# EAGLE board Final Practicum Board Layout (EAGLE 9.5.1)
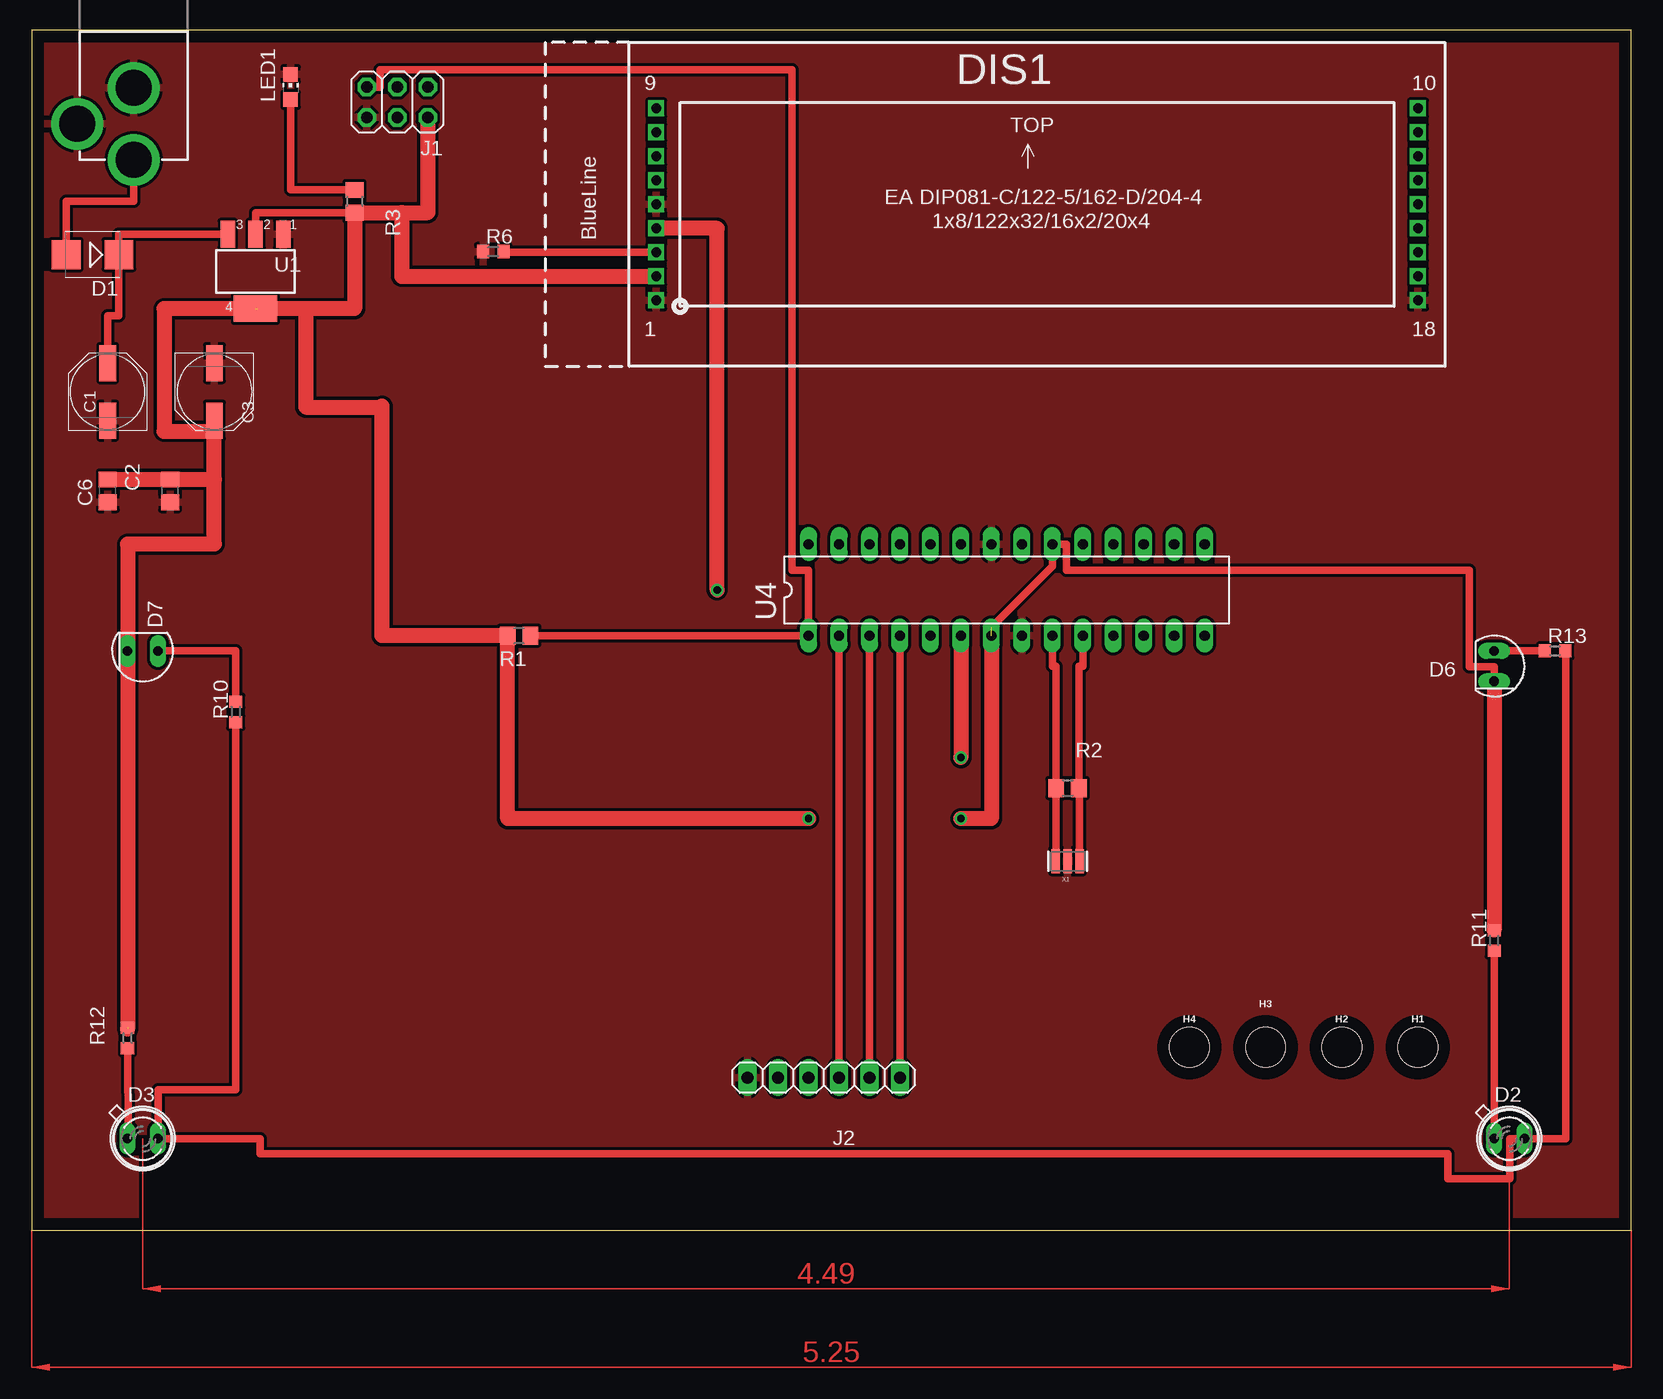
[diagram p0: board, top side]
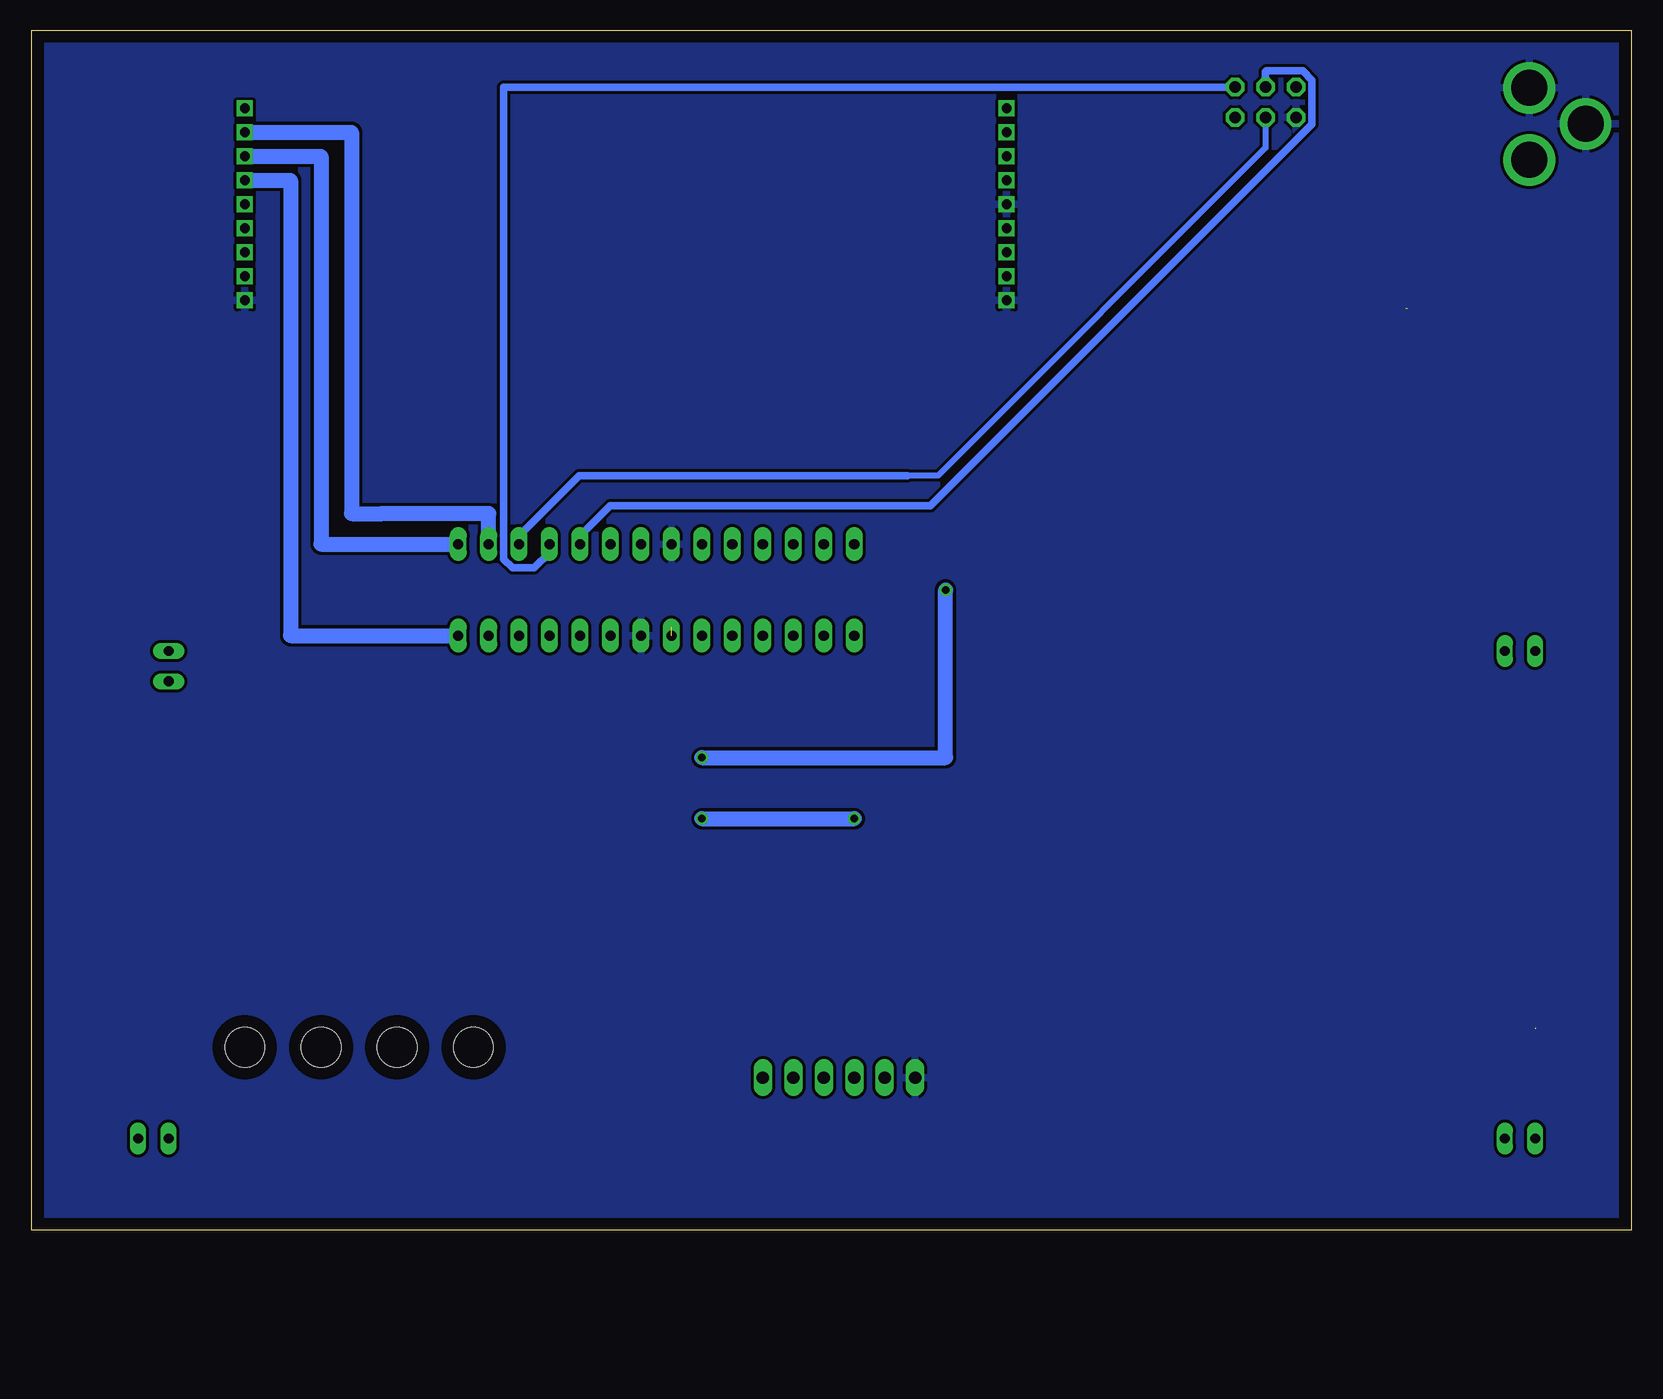
[diagram p1: board, bottom side, seen from below]

Size 133.33 x 100 mm. Coordinates in mm from the lower left corner, seen from the top.
Outline: 0,0 133.33,0 133.33,100 0,100 0,0
Copper layers (1*16): Top 0.035mm / dielectric 1.5mm / Bottom 0.035mm
Design rules "default": minimum track width 6mil, minimum drill 0.35mm, track to track 6mil, track to pad 6mil, pad to pad 6mil, via to via 6mil, smd to smd 6mil, copper to edge 40mil, drill to drill 6mil, minimum pad ring 10mil, minimum via ring 8mil, stop-mask expansion 4mil, vias tented up to drill 0mil, thermal gap 10mil
Net classes: 0 default: width 0.254 mm, clearance 0.254 mm; 1 power: width 0.61 mm, drill 0.61 mm, clearance 0.254 mm; 2 gnd: width 0.305 mm, drill 0.559 mm, clearance 0.254 mm; 3 usbvcc: width 0.508 mm, drill 0.61 mm, clearance 0.254 mm

## Footprints (pad centres in the part's own frame; a part is rotated, then mirrored left to right if it is on the bottom)
PANASONIC_D = smd 3 x 1.4: + 2.4,0; - -2.4,0
C0805 = smd 1.3 x 1.5: 1 -0.95,0; 2 0.95,0
SMB = smd 2.4 x 2.4: A 2.2,0; C -2.2,0
SFH482 = drill 0.813 long: A -1.27,0; K 1.27,0
SFH206 = drill 0.813 long: A 0,-1.27; K 0,1.27
EA_DIP = drill 0.813 pad 1.27 square: 1 0,0; 2 0,2; 3 0,4; 4 0,6; 5 0,8; 6 0,10; 7 0,12; 8 0,14; 9 0,16; 10 63.5,16; 11 63.5,14; 12 63.5,12; 13 63.5,10; 14 63.5,8; 15 63.5,6; 16 63.5,4; 17 63.5,2; 18 63.5,0
STAND-OFF = hole 3.302: 0,0
2X03 = drill 0.95 pad 1.55 octagon: 1 -2.54,-1.27; 2 -2.54,1.27; 3 0,-1.27; 4 0,1.27; 5 2.54,-1.27; 6 2.54,1.27
1X06 = drill 1.016 long: 1 -6.35,0; 2 -3.81,0; 3 -1.27,0; 4 1.27,0; 5 3.81,0; 6 6.35,0
POWER_JACK_PTH = drill 2.997 pad 4.318: GND 0,7.7; GNDBREAK 4.7,10.7; PWR 0,13.7
CHIP-LED0805 = smd 1.2 x 1.2: A 0,-1.05; C 0,1.05
R0805 = smd 1.3 x 1.5: 1 -0.95,0; 2 0.95,0
R0603 = smd 1 x 1.1: 1 -0.85,0; 2 0.85,0
SOT223 = smd 1.219 x 2.235: 1 -2.311,-3.099; 2 0,-3.099; 3 2.311,-3.099 | smd 3.6 x 2.2: 4 0,3.099
DIL28-3 = drill 0.85 pad 1.422 long: 1 -16.51,-3.81; 2 -13.97,-3.81; 3 -11.43,-3.81; 4 -8.89,-3.81; 5 -6.35,-3.81; 6 -3.81,-3.81; 7 -1.27,-3.81; 8 1.27,-3.81; 9 3.81,-3.81; 10 6.35,-3.81; 11 8.89,-3.81; 12 11.43,-3.81; 13 13.97,-3.81; 14 16.51,-3.81; 15 16.51,3.81; 16 13.97,3.81; 17 11.43,3.81; 18 8.89,3.81; 19 6.35,3.81; 20 3.81,3.81; 21 1.27,3.81; 22 -1.27,3.81; 23 -3.81,3.81; 24 -6.35,3.81; 25 -8.89,3.81; 26 -11.43,3.81; 27 -13.97,3.81; 28 -16.51,3.81
RESONATOR = smd 0.7 x 2: 1 -1,0; 2 0,0; 3 1,0

## Placement (x,y rotation side)
C1  47u  [PANASONIC_D]  6.35,69.85 90 top
C2  100n  [C0805]  11.56,61.59 90 top
C3  47u  [PANASONIC_D]  15.24,69.85 270 top
C6  100n  [C0805]  6.35,61.59 90 top
D1  M7  [SMB]  5.08,81.28 180 top
D2  SFH482  [SFH482]  123.19,7.62 0 top
D3  SFH482  [SFH482]  9.27,7.62 0 top
D6  SFH206  [SFH206]  121.92,46.99 180 top
D7  SFH206  [SFH206]  9.27,48.26 90 top
DIS1  EA_DIP  [EA_DIP]  52.07,77.47 0 top
H1  STAND-OFF  [STAND-OFF]  115.57,15.24 0 top
H2  STAND-OFF  [STAND-OFF]  109.22,15.24 0 top
H3  STAND-OFF  [STAND-OFF]  102.87,15.24 0 top
H4  STAND-OFF  [STAND-OFF]  96.52,15.24 0 top
J1  3x2 M  [2X03]  30.48,93.98 180 top
J2  [1X06]  66.04,12.7 180 top
J4  POWER_JACK  [POWER_JACK_PTH]  8.51,102.87 180 top
LED1  GREEN  [CHIP-LED0805]  21.59,95.25 0 top
R1  10K  [R0805]  40.64,49.53 180 top
R2  1M  [R0805]  86.36,36.83 0 top
R3  1K  [R0805]  26.92,85.72 270 top
R6  1K  [R0603]  38.48,81.53 0 top
R10  10K  [R0603]  17.02,43.18 90 top
R11  100  [R0603]  121.92,24.13 90 top
R12  100  [R0603]  8,16 90 top
R13  10k  [R0603]  127,48.26 0 top
U1  NCP1117ST50T3G  [SOT223]  18.67,79.88 180 top
U4  ATMEGA328P-PU  [DIL28-3]  81.28,53.34 0 top
X1  CSTCE16M0V53-R0 16MHZ  [RESONATOR]  86.36,30.73 180 top

## Library data of the parts
C1-C3 C6 R1-R3 = rcl
D1 = diode
D2 D3 LED1 = led
D6 D7 = opto-trans-siemens; MPN: SFH206K; OC_FARNELL: 1212741; OC_NEWARK: 01M8807
DIS1 = display-lcd
H1-H4 = SparkFun-Hardware
J1 U4 X1 = SmartPrj
J2 = pinhead
J4 = SparkFun-Connectors; PROD_ID: CONN-08197
R6 R10-R13 = rcl; SPICEPREFIX: R
U1 = linear

## Nets
0: D2.K D3.K R10.1 R13.2
+3V3: DIS1.17
+5V [usbvcc]: C2.2 C3.+ C6.2 D6.K D7.K DIS1.2 J1.2 R1.2 R3.2 R11.2 R12.2 U1.2 U1.4 U4.7 U4.20
GND [gnd]: C1.- C2.1 C3.- C6.1 DIS1.1 DIS1.5 DIS1.18 J1.6 J2.6 J4.GND J4.GNDBREAK LED1.C R6.1 U1.1 U4.8 U4.22 X1.2
IR_PAIR1: D6.A R13.1
IR_PAIR2: D7.A R10.2
LCD_E: DIS1.6
MISO: J1.1 U4.18
MOSI: J1.4 U4.17
N$1: DIS1.4 U4.6
N$2: DIS1.3 R6.2
N$3: LED1.A R3.1
N$4: J2.3 U4.2
N$5: DIS1.13 U4.14
N$6: DIS1.12 U4.15
N$7: DIS1.11 U4.16
N$8: D2.A R11.1
N$9: J2.2 U4.3
N$10: J2.1 U4.4
N$12: D3.A R12.1
PWRIN [power]: D1.A J4.PWR
RESET: J1.5 R1.1 U4.1
SCK: J1.3 U4.19
VIN [power]: C1.+ D1.C U1.3
XTAL1: R2.1 U4.9 X1.3
XTAL2: R2.2 U4.10 X1.1

## Tracks (layer width: path | path; a pad name or v marks a point on that pad's centre or on a via)
0
  Top 0.61: R10.1 17.02,11.68 10.54,11.68 D3.K 19.05,7.62 19.05,6.35 118.06,6.35 118.06,4.27 123.24,4.27 123.24,7.62 D2.K 127.89,7.62 127.89,48.22 R13.2
+5V  (via drill 0.61)  (3 unrouted)
  Top 0.61: U1.2 18.67,84.78 R3.2 | D6.K 121.92,46.94 119.84,46.94 119.84,54.97 86.26,54.97 86.26,57.15 U4.20 85.09,55.32 80.01,50.24
  Top 1.27: 15.24,62.55 15.24,57.15 8,57.15 D7.K 8,16.76 | 15.24,62.55 C3.+ 15.24,66.55 11.05,66.55 11.05,76.78 U1.4 | J1.2 33.02,84.78 30.86,84.78 | 30.86,84.78 R3.2 26.92,76.78 22.86,76.78 | 22.86,76.78 18.8,76.78 | D6.K R11.2 | 29.21,68.58 29.21,49.53 R1.2 39.69,34.29 v64.77,34.29 | U4.7 80.01,34.29 v77.47,34.29 | DIS1.2 30.86,79.47 30.86,84.78 | 22.86,76.78 22.86,68.58 29.21,68.58 | 29.21,68.58 29.21,68.65 | C6.2 C2.2 15.24,62.55
  Bottom 1.27: v77.47,34.29 v64.77,34.29
GND
  pour Top: 0,100.33 133.35,100.33 133.35,0 0,0
  pour Bottom: 0,0 133.35,0 133.35,100.33 0,100.33
IR_PAIR1
  Top 0.61: R13.1 D6.A
IR_PAIR2
  Top 0.61: D7.A 17.02,48.26 R10.2
MISO
  Bottom 0.61: U4.18 90.17,56.44 91.44,55.17 93.24,55.17 93.98,55.91 93.98,95.25 J1.1
MOSI
  Bottom 0.508: J1.4 30.48,90.17 57.78,62.87 60.33,62.87
  Bottom 0.61: U4.17 92.71,57.86 87.71,62.87 60.33,62.87
N$1  (via drill 0.61)
  Top 1.27: U4.6 v77.47,39.37 | DIS1.4 57.15,83.47 v57.15,53.34
  Bottom 1.27: v77.47,39.37 57.15,39.37 v57.15,53.34
N$2
  Top 0.61: DIS1.3 39.33,81.47 R6.2
N$3
  Top 0.61: R3.1 21.59,86.67 LED1.A
N$4
  Top 0.61: J2.3 67.31,13.46 67.31,48.82 U4.2
N$5
  Bottom 0.61: DIS1.13 115.46,87.47
  Bottom 1.27: DIS1.13 111.76,87.47 111.76,49.53 U4.14
N$6
  Bottom 1.27: DIS1.12 109.22,89.47 109.22,57.15 U4.15
N$7
  Bottom 1.27: U4.16 95.25,59.69 102.87,59.69 104.14,59.69 106.68,59.69 106.68,91.47 DIS1.11
N$8
  Top 0.61: R11.1 D2.A
N$9
  Top 0.61: J2.2 69.85,13.46 69.85,48.82 U4.3
N$10
  Top 0.61: J2.1 72.39,13.46 72.39,48.82 U4.4
N$12
  Top 0.61: R12.1 8.04,7.62 D3.A
PWRIN
  Top 0.61: D1.A 2.88,85.72 8.51,85.72 J4.PWR
RESET
  Top 0.61: J1.5 29.05,95.25 29.05,96.69 63.4,96.69 63.4,54.97 64.77,54.97 U4.1 R1.1
SCK
  Bottom 0.508: 30.48,96.52 30.42,96.58
  Bottom 0.61: U4.19 87.63,57.86 85.13,60.36 58.4,60.36 26.61,92.16 26.61,95.8 27.39,96.58 29.15,96.58 30.42,96.58 | J1.3 30.48,96.52
VIN
  Top 0.61: U1.3 7.28,82.98 D1.C 7.28,76.2 6.35,76.2 C1.+
XTAL1
  Top 0.61: R2.1 85.09,36.83 | R2.1 85.41,30.73 X1.3 | R2.1 85.41,46.99 85.09,46.99 U4.9
XTAL2
  Top 0.61: X1.1 87.36,36.83 R2.2 87.31,46.99 87.63,46.99 U4.10
(copper drawn outside any net)
  shapes: Top area x3